# EAGLE board esc_spray_etcher (EAGLE 7.7.0)
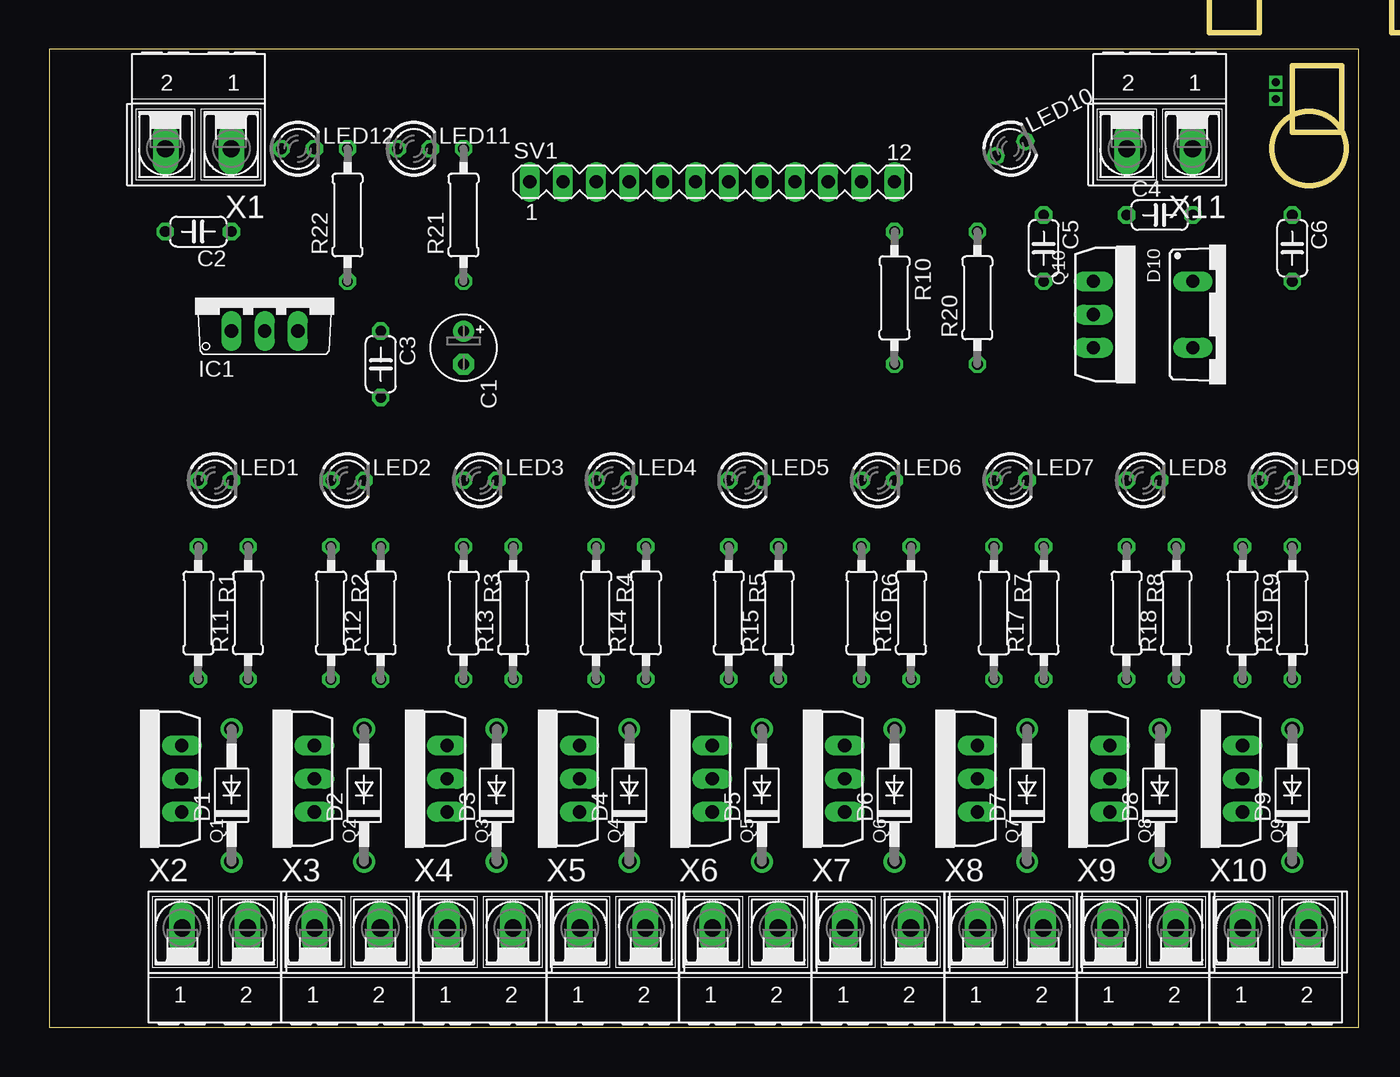
[diagram p0: board, top side]
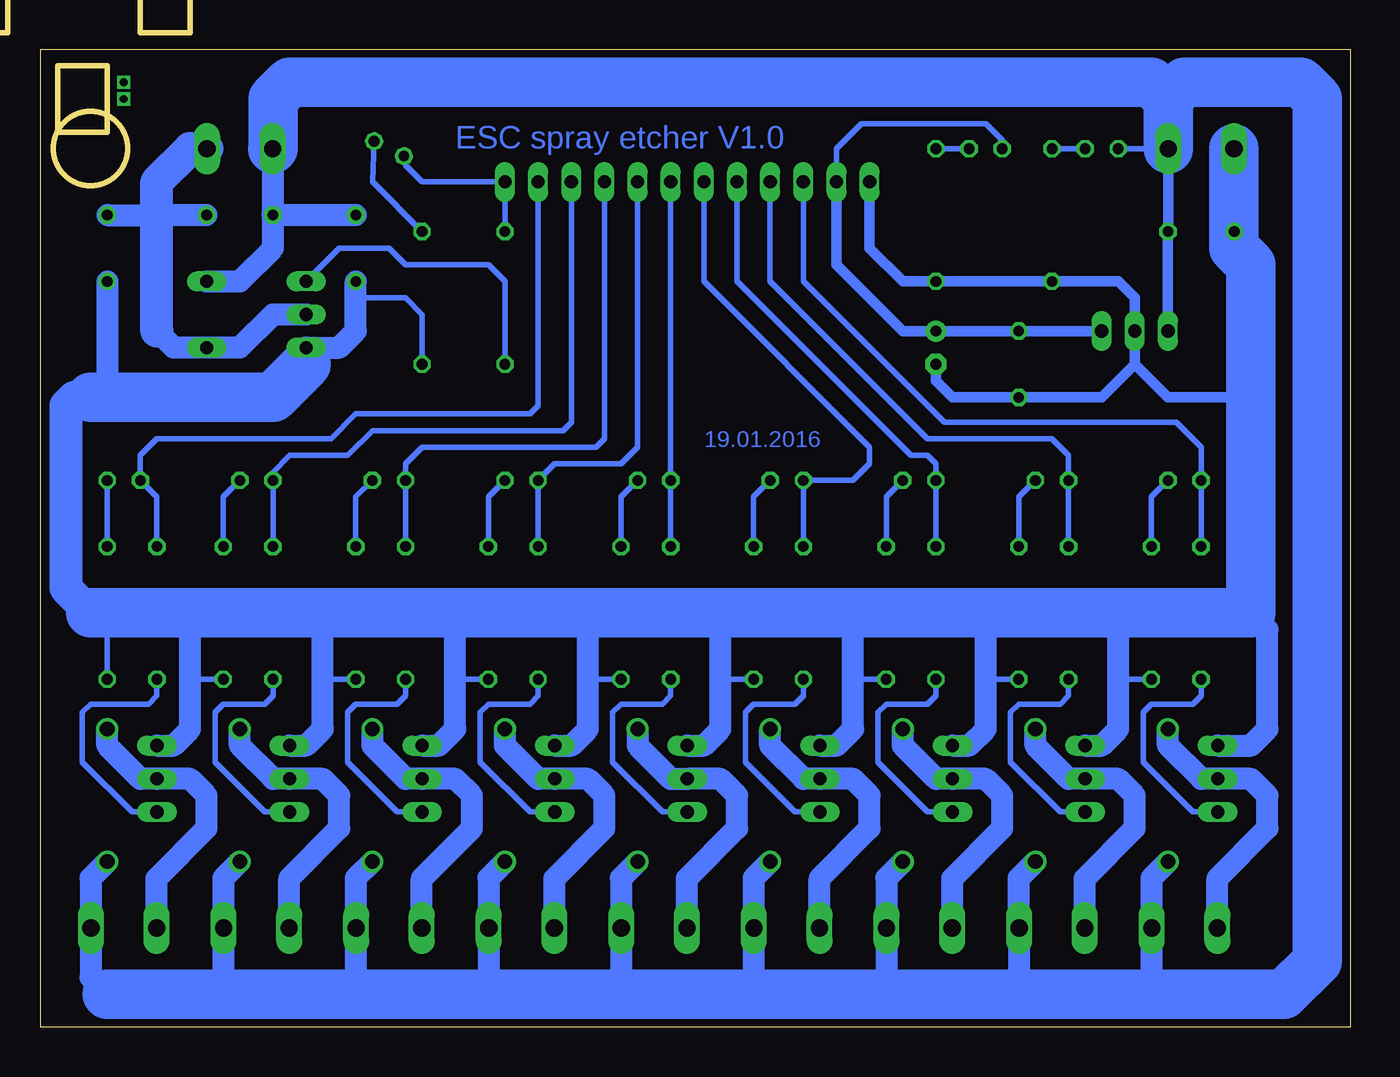
[diagram p1: board, bottom side, seen from below]

Size 100.33 x 74.93 mm. Coordinates in mm from the lower left corner, seen from the top.
Outline: 0,0 100.33,0 100.33,74.93 0,74.93 0,0
Copper layers (1*16): Top 0.035mm / dielectric 1.5mm / Bottom 0.035mm
Design rules "esc_spray_etcher": minimum track width 10mil, minimum drill 24mil, track to track 16mil, track to pad 16mil, pad to pad 0.205mm, via to via 0.205mm, smd to smd 8mil, copper to edge 4mil, drill to drill 8mil, minimum pad ring 10mil, minimum via ring 8mil, stop-mask expansion 4mil, vias tented up to drill 0mil, thermal gap 10mil
Net classes: 0 default: width 0.406 mm, drill 0.8 mm, clearance 0.203 mm
Milling: area 93.7,64.5 to 99.4,70.1; 26 lines

## Footprints (pad centres in the part's own frame; a part is rotated, then mirrored left to right if it is on the bottom)
E2,5-5 = drill 0.813 pad 1.6: + -1.27,0 | drill 0.813 pad 1.6 octagon: - 1.27,0
C050-024X044 = drill 0.813 octagon: 1 -2.54,0; 2 2.54,0
DO41-10 = drill 1.118: A 5.08,0; C -5.08,0
TO220ACS = drill 1.016 long: A 2.54,-2.54; C -2.54,-2.54
TO220V = drill 1.016 long: 1 -2.54,-2.54; 2 0,-2.54; 3 2.54,-2.54
LED3MM = drill 0.813 octagon: A -1.27,0; K 1.27,0
TO262-H = drill 1.016 long: 1 -2.54,0; 2 0,0; 3 2.54,0
0207/10 = drill 0.813 octagon: 1 -5.08,0; 2 5.08,0
MA12-1 = drill 1.016 long: 1 -13.97,0; 2 -11.43,0; 3 -8.89,0; 4 -6.35,0; 5 -3.81,0; 6 -1.27,0; 7 1.27,0; 8 3.81,0; 9 6.35,0; 10 8.89,0; 11 11.43,0; 12 13.97,0
AK500/2-H = drill 1.321 long: 1 -2.515,0; 2 2.515,0

## Placement (x,y rotation side)
C1  10u  [E2,5-5]  31.75,52.07 270 top
C2  100n  [C050-024X044]  11.43,60.96 180 top
C3  100n  [C050-024X044]  25.4,50.8 270 top
C4  100n  [C050-024X044]  85.09,62.23 0 top
C5  100n  [C050-024X044]  76.2,59.69 270 top
C6  100n  [C050-024X044]  95.25,59.69 270 top
D1  1N4004  [DO41-10]  13.97,17.78 90 top
D2  1N4004  [DO41-10]  24.13,17.78 90 top
D3  1N4004  [DO41-10]  34.29,17.78 90 top
D4  1N4004  [DO41-10]  44.45,17.78 90 top
D5  1N4004  [DO41-10]  54.61,17.78 90 top
D6  1N4004  [DO41-10]  64.77,17.78 90 top
D7  1N4004  [DO41-10]  74.93,17.78 90 top
D8  1N4004  [DO41-10]  85.09,17.78 90 top
D9  1N4004  [DO41-10]  95.25,17.78 90 top
D10  HFA15TB60-V  [TO220ACS]  90.17,54.61 270 top
IC1  7805TV  [TO220V]  16.51,55.88 0 top
LED1  [LED3MM]  12.7,41.91 0 top
LED2  [LED3MM]  22.86,41.91 0 top
LED3  [LED3MM]  33.02,41.91 0 top
LED4  [LED3MM]  43.18,41.91 0 top
LED5  [LED3MM]  53.34,41.91 0 top
LED6  [LED3MM]  63.5,41.91 0 top
LED7  [LED3MM]  73.66,41.91 0 top
LED8  [LED3MM]  83.82,41.91 0 top
LED9  [LED3MM]  93.98,41.91 0 top
LED10  [LED3MM]  73.66,67.31 26.5 top
LED11  [LED3MM]  27.94,67.31 0 top
LED12  [LED3MM]  19.05,67.31 0 top
Q1  IRF1010NL  [TO262-H]  10.16,19.05 90 top
Q2  IRF1010NL  [TO262-H]  20.32,19.05 90 top
Q3  IRF1010NL  [TO262-H]  30.48,19.05 90 top
Q4  IRF1010NL  [TO262-H]  40.64,19.05 90 top
Q5  IRF1010NL  [TO262-H]  50.8,19.05 90 top
Q6  IRF1010NL  [TO262-H]  60.96,19.05 90 top
Q7  IRF1010NL  [TO262-H]  71.12,19.05 90 top
Q8  IRF1010NL  [TO262-H]  81.28,19.05 90 top
Q9  IRF1010NL  [TO262-H]  91.44,19.05 90 top
Q10  IRF1010NL  [TO262-H]  80.01,54.61 270 top
R1  330  [0207/10]  11.43,31.75 270 top
R2  330  [0207/10]  21.59,31.75 270 top
R3  330  [0207/10]  31.75,31.75 270 top
R4  330  [0207/10]  41.91,31.75 270 top
R5  330  [0207/10]  52.07,31.75 270 top
R6  330  [0207/10]  62.23,31.75 270 top
R7  330  [0207/10]  72.39,31.75 270 top
R8  330  [0207/10]  82.55,31.75 270 top
R9  330  [0207/10]  91.44,31.75 270 top
R10  330  [0207/10]  64.77,55.88 270 top
R11  1k5  [0207/10]  15.24,31.75 90 top
R12  1k5  [0207/10]  25.4,31.75 90 top
R13  1k5  [0207/10]  35.56,31.75 90 top
R14  1k5  [0207/10]  45.72,31.75 90 top
R15  1k5  [0207/10]  55.88,31.75 90 top
R16  1k5  [0207/10]  66.04,31.75 90 top
R17  1k5  [0207/10]  76.2,31.75 90 top
R18  1k5  [0207/10]  86.36,31.75 90 top
R19  1k5  [0207/10]  95.25,31.75 90 top
R20  1k5  [0207/10]  71.12,55.88 90 top
R21  1k5  [0207/10]  31.75,62.23 90 top
R22  4k7  [0207/10]  22.86,62.23 90 top
SV1  [MA12-1]  50.8,64.77 0 top
X1  [AK500/2-H]  11.43,67.31 180 top
X2  [AK500/2-H]  12.7,7.62 0 top
X3  [AK500/2-H]  22.86,7.62 0 top
X4  [AK500/2-H]  33.02,7.62 0 top
X5  [AK500/2-H]  43.18,7.62 0 top
X6  [AK500/2-H]  53.34,7.62 0 top
X7  [AK500/2-H]  63.5,7.62 0 top
X8  [AK500/2-H]  73.66,7.62 0 top
X9  [AK500/2-H]  83.82,7.62 0 top
X10  [AK500/2-H]  93.98,7.62 0 top
X11  [AK500/2-H]  85.09,67.31 180 top

## Library data of the parts
C1-C6 R1-R22 = resistor
D1-D9 = diode
D10 = diode_github
IC1 = linear
LED1-LED12 = led
Q1-Q10 = transistor_fet
SV1 = con-lstb; OC_FARNELL: unknown; OC_NEWARK: unknown
X1-X11 = con-ptr500; OC_FARNELL: unknown; OC_NEWARK: unknown

## Nets
+5V: C1.+ C3.1 IC1.3 LED11.A SV1.2
+12V: C2.1 C4.1 C5.1 D1.C D2.C D3.C D4.C D5.C D6.C D7.C D8.C D9.C D10.C IC1.1 LED12.A X1.1 X2.2 X3.2 X4.2 X5.2 X6.2 X7.2 X8.2 X9.2 X10.2 X11.2
GND: C1.- C2.2 C3.2 C5.2 C6.2 IC1.2 Q1.3 Q2.3 Q3.3 Q4.3 Q5.3 Q6.3 Q7.3 Q8.3 Q9.3 Q10.3 R11.1 R12.1 R13.1 R14.1 R15.1 R16.1 R17.1 R18.1 R19.1 R20.1 R21.1 R22.1 SV1.1 X1.2
N$1: Q1.1 R1.2
N$2: D1.A Q1.2 X2.1
N$3: LED2.A R2.1 SV1.4
N$4: LED3.A R3.1 SV1.5
N$5: Q2.1 R2.2
N$6: D2.A Q2.2 X3.1
N$7: Q3.1 R3.2
N$8: D3.A Q3.2 X4.1
N$9: Q4.1 R4.2
N$10: D4.A Q4.2 X5.1
N$11: Q5.1 R5.2
N$12: D5.A Q5.2 X6.1
N$13: Q6.1 R6.2
N$14: D6.A Q6.2 X7.1
N$15: Q7.1 R7.2
N$16: D7.A Q7.2 X8.1
N$17: Q8.1 R8.2
N$18: D8.A Q8.2 X9.1
N$19: Q9.1 R9.2
N$20: D9.A Q9.2 X10.1
N$21: LED1.A R1.1 SV1.3
N$22: LED4.A R4.1 SV1.6
N$23: LED5.A R5.1 SV1.7
N$24: LED6.A R6.1 SV1.8
N$25: LED7.K R17.2
N$26: LED7.A R7.1 SV1.9
N$27: LED8.A R8.1 SV1.10
N$29: Q10.1 R10.2
N$30: C4.2 C6.1 D10.A Q10.2 X11.1
N$31: LED9.A R9.1 SV1.11
N$32: LED1.K R11.2
N$33: LED2.K R12.2
N$34: LED3.K R13.2
N$35: LED4.K R14.2
N$36: LED5.K R15.2
N$37: LED6.K R16.2
N$38: LED10.A R10.1 SV1.12
N$39: LED8.K R18.2
N$40: LED9.K R19.2
N$41: LED10.K R20.2
N$42: LED12.K R22.2
N$46: LED11.K R21.2

## Tracks (layer width: path | path; a pad name or v marks a point on that pad's centre or on a via)
+5V
  Bottom 0.406: SV1.2 39.37,67.31 37.47,69.22 27.94,69.22 26.67,67.94 LED11.A
  Bottom 0.813: IC1.3 C3.1 C1.+ 34.29,53.34 39.37,58.42 SV1.2
+12V
  Bottom 0.406: LED12.A X1.1
  Bottom 0.813: X1.1 13.95,60.98 C2.1 IC1.1
  Bottom 1.676: D1.C 15.24,11.43 15.24,7.64 | 15.24,7.64 X2.2 | 25.4,7.64 X3.2 | D4.C 45.72,11.43 45.72,7.64 | 45.72,7.64 X5.2 | D5.C 55.88,11.43 55.88,7.64 | 55.88,7.64 X6.2 | D6.C 66.04,11.43 66.04,7.64 | 66.04,7.64 X7.2 | D7.C 76.2,11.43 76.2,7.64 | 76.2,7.64 X8.2 | D8.C 86.36,11.43 86.36,7.64 | 86.36,7.64 X9.2 | 96.52,7.64 96.52,11.43 D9.C | 96.52,7.64 X10.2 | 96.52,7.64 96.52,3.81 95.25,2.54 | X11.2 82.58,62.26 C4.1 | D10.C 85.09,57.15 82.55,59.69 C4.1 | C5.1 C4.1 | 15.24,7.64 15.24,2.54 | 25.4,7.64 25.4,2.54 | 35.56,2.54 35.53,2.56 X4.2 35.56,7.64 35.56,11.43 D3.C | 45.72,7.64 45.72,2.54 | 55.88,7.64 55.88,2.54 | 66.04,7.64 66.04,2.54 | 76.2,7.64 76.2,2.54 | 86.36,7.64 86.36,2.54 | 25.4,7.64 25.4,11.43 D2.C
  Bottom 3.81: 95.25,2.54 86.36,2.54 76.2,2.54 66.04,2.54 55.88,2.54 45.72,2.54 35.56,2.54 25.4,2.54 15.24,2.54 5.08,2.54 2.54,5.08 2.54,71.12 3.81,72.39 12.7,72.39 13.95,71.14 X1.1 13.95,71.09 15.24,72.39 81.28,72.39 82.55,71.12 82.55,67.33 X11.2
GND
  Bottom 0.406: R11.1 17.78,26.67 | R12.1 27.94,26.67 | R13.1 38.1,26.67 | R14.1 48.26,26.67 | R15.1 58.42,26.67 | R16.1 68.58,26.67 | R17.1 78.74,26.67 | R18.1 88.9,26.67 | R19.1 95.25,31.75 | R20.1 71.12,54.61 72.39,55.88 76.2,55.88
  Bottom 0.813: 16.51,50.8 IC1.2 16.51,55.88 17.78,57.15 R22.1 R21.1 34.29,57.15 36.83,59.69 SV1.1 | 16.51,50.8 13.97,48.26 7.62,48.26 | C1.- 31.75,49.53 30.48,48.26 C3.2 19.05,48.26 16.51,50.8
  Bottom 1.676: Q1.3 7.62,21.59 6.35,22.86 6.35,30.48 7.62,31.75 | Q2.3 19.05,21.59 17.78,22.86 17.78,26.67 17.78,31.75 | Q3.3 29.21,21.59 27.94,22.86 27.94,26.67 27.94,31.75 | Q4.3 39.37,21.59 38.1,22.86 38.1,26.67 38.1,31.75 | Q5.3 49.53,21.59 48.26,22.86 48.26,26.67 48.26,31.75 | Q6.3 59.69,21.59 58.42,22.86 58.42,26.67 58.42,31.75 | Q7.3 69.85,21.59 68.58,22.86 68.58,26.67 68.58,31.75 | Q8.3 80.01,21.59 78.74,22.86 78.74,26.67 78.74,31.75 | Q9.3 90.17,21.59 88.9,22.86 88.9,26.67 88.9,31.75 | 80.01,50.8 Q10.3 77.47,52.07 76.2,53.34 76.2,55.88 C5.2 | C6.2 95.25,48.26 | C2.2 8.91,60.96
  Bottom 2.54: 96.52,48.26 97.79,48.26 98.42,47.62 98.42,33.66 96.52,31.75
  Bottom 3.81: X1.2 8.91,60.96 8.91,59.72 7.62,58.42 7.62,48.26 7.62,31.75 17.78,31.75 27.94,31.75 38.1,31.75 48.26,31.75 58.42,31.75 68.58,31.75 78.74,31.75 88.9,31.75 95.25,31.75 96.52,31.75 | 80.01,50.8 82.55,48.26 95.25,48.26 96.52,48.26
N$1
  Bottom 0.406: Q1.1 12.06,16.51 15.88,20.32 15.88,24.13 15.24,24.77 12.06,24.77 11.43,25.4 R1.2
N$2
  Bottom 1.676: X2.1 10.19,11.4 6.35,15.24 6.35,17.78 7.62,19.05 Q1.2 11.43,19.05 13.97,21.59 D1.A
N$3
  Bottom 0.406: R2.1 LED2.A 21.59,43.81 22.86,45.09 32.38,45.09 44.45,57.15 SV1.4
N$4
  Bottom 0.406: R3.1 LED3.A 31.75,43.18 32.38,43.81 33.66,43.81 46.99,57.15 SV1.5
N$5
  Bottom 0.406: Q2.1 22.23,16.51 26.04,20.32 26.04,24.13 25.4,24.77 22.23,24.77 21.59,25.4 R2.2
N$6
  Bottom 1.676: X3.1 20.34,11.4 16.51,15.24 16.51,17.78 17.78,19.05 Q2.2 21.59,19.05 24.13,21.59 D2.A
N$7
  Bottom 0.406: Q3.1 32.38,16.51 36.2,20.32 36.2,24.13 35.56,24.77 32.38,24.77 31.75,25.4 R3.2
N$8
  Bottom 1.676: X4.1 30.5,11.4 26.67,15.24 26.67,17.78 27.94,19.05 Q3.2 31.75,19.05 34.29,21.59 D3.A
N$9
  Bottom 0.406: Q4.1 42.55,16.51 46.35,20.32 46.35,24.13 45.72,24.77 42.55,24.77 41.91,25.4 R4.2
N$10
  Bottom 1.676: X5.1 40.66,11.4 36.83,15.24 36.83,17.78 38.1,19.05 Q4.2 41.91,19.05 44.45,21.59 D4.A
N$11
  Bottom 0.406: Q5.1 52.7,16.51 56.52,20.32 56.52,24.13 55.88,24.77 52.7,24.77 52.07,25.4 R5.2
N$12
  Bottom 1.676: X6.1 50.83,11.4 46.99,15.24 46.99,17.78 48.26,19.05 Q5.2 52.07,19.05 54.61,21.59 D5.A
N$13
  Bottom 0.406: Q6.1 62.87,16.51 66.67,20.32 66.67,24.13 66.04,24.77 62.87,24.77 62.23,25.4 R6.2
N$14
  Bottom 1.676: X7.1 60.98,11.4 57.15,15.24 57.15,17.78 58.42,19.05 Q6.2 62.23,19.05 64.77,21.59 D6.A
N$15
  Bottom 0.406: Q7.1 73.03,16.51 76.83,20.32 76.83,24.13 76.2,24.77 73.03,24.77 72.39,25.4 R7.2
N$16
  Bottom 1.676: X8.1 71.14,11.4 67.31,15.24 67.31,17.78 68.58,19.05 Q7.2 72.39,19.05 74.93,21.59 D7.A
N$17
  Bottom 0.406: Q8.1 83.19,16.51 87,20.32 87,24.13 86.68,24.45 86.36,24.77 83.19,24.77 82.55,25.4 R8.2
N$18
  Bottom 1.676: X9.1 81.31,11.4 77.47,15.24 77.47,17.78 78.74,19.05 Q8.2 82.55,19.05 85.09,21.59 D8.A
N$19
  Bottom 0.406: Q9.1 93.34,16.51 97.16,20.32 97.16,24.13 96.52,24.77 92.08,24.77 91.44,25.4 R9.2
N$20
  Bottom 1.676: X10.1 91.47,11.4 87.63,15.24 87.63,17.78 88.9,19.05 Q9.2 92.71,19.05 95.25,21.59 D9.A
N$21
  Bottom 0.406: R1.1 LED1.A 11.43,44.45 13.34,46.35 31.11,46.35 41.91,57.15 SV1.3
N$22
  Bottom 0.406: R4.1 LED4.A 38.1,41.91 36.83,43.18 36.83,44.45 49.53,57.15 SV1.6
N$23
  Bottom 0.406: R5.1 LED5.A SV1.7
N$24
  Bottom 0.406: R6.1 LED6.A 60.96,43.18 55.88,43.18 54.61,44.45 SV1.8
N$25
  Bottom 0.406: LED7.K 76.2,40.64 R17.2
N$26
  Bottom 0.406: R7.1 LED7.A 72.39,43.18 71.12,44.45 57.78,44.45 57.15,45.09 SV1.9
N$27
  Bottom 0.406: R8.1 LED8.A 82.55,42.55 81.28,43.81 76.83,43.81 74.93,45.72 60.33,45.72 59.69,46.35 SV1.10
N$28  (via drill 0.6)
  other vias: 93.98,72.39
N$29
  Bottom 0.406: Q10.1 77.47,59.69 73.66,59.69 72.39,58.42 66.04,58.42 64.77,57.15 R10.2
N$30
  Bottom 1.676: Q10.2 82.55,54.61 85.09,52.07 D10.A 90.17,52.07 91.44,53.34 | C6.1 91.44,62.23 C4.2
  Bottom 2.54: 91.44,53.34 91.44,62.23 91.44,64.77 88.9,67.31 X11.1
N$31
  Bottom 0.406: SV1.11 62.23,47.62 62.87,46.99 76.2,46.99 78.11,45.09 91.44,45.09 92.71,43.81 LED9.A 91.44,40.64 R9.1
N$32
  Bottom 0.406: LED1.K 15.24,40.64 R11.2
N$33
  Bottom 0.406: LED2.K 25.4,40.64 R12.2
N$34
  Bottom 0.406: LED3.K 35.56,40.64 R13.2
N$35
  Bottom 0.406: LED4.K 45.72,40.64 R14.2
N$36
  Bottom 0.406: LED5.K 55.88,40.64 R15.2
N$37
  Bottom 0.406: LED6.K 66.04,40.64 R16.2
N$38
  Bottom 0.406: R10.1 SV1.12 71.12,64.77 72.39,66.04 LED10.A
N$39
  Bottom 0.406: LED8.K 86.36,40.64 R18.2
N$40
  Bottom 0.406: LED9.K R19.2
N$41
  Bottom 0.406: LED10.K 74.93,64.77 R20.2
N$42
  Bottom 0.406: R22.2 LED12.K
N$43  (via drill 0.6)
  other vias: 93.98,71.12
N$46
  Bottom 0.406: R21.2 LED11.K

## Text on the board
Bottom: ESC spray etcher V1.0 | 19.01.2016